# EAGLE board Plinto-Rev_02 (EAGLE 6.5.0)
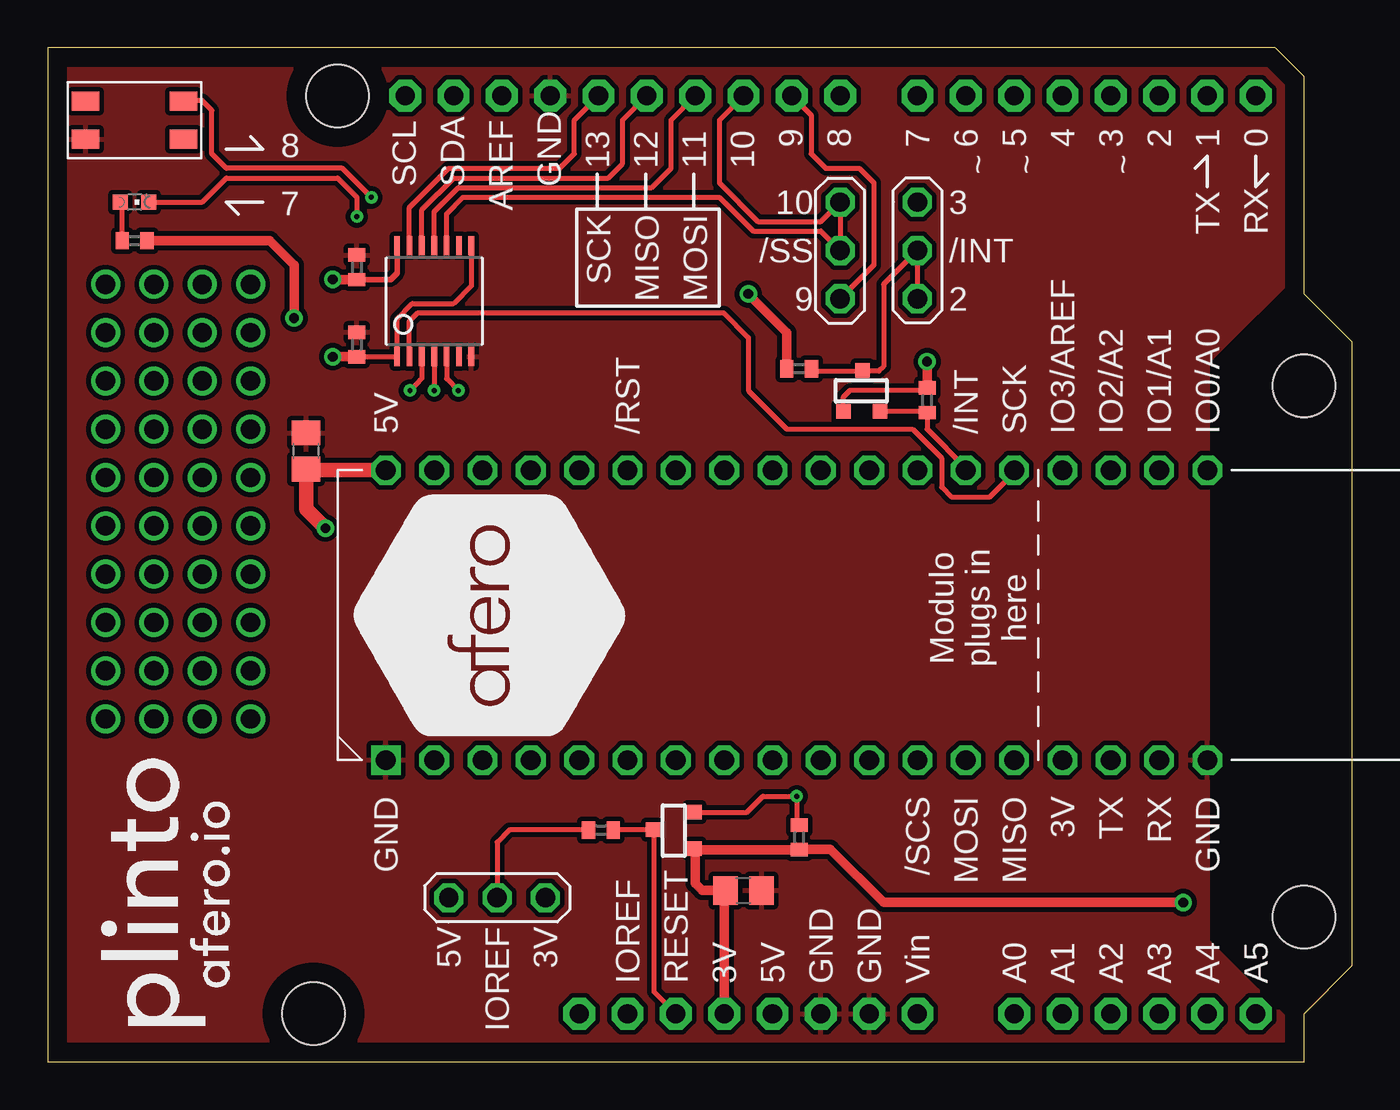
[diagram p0: board, top side]
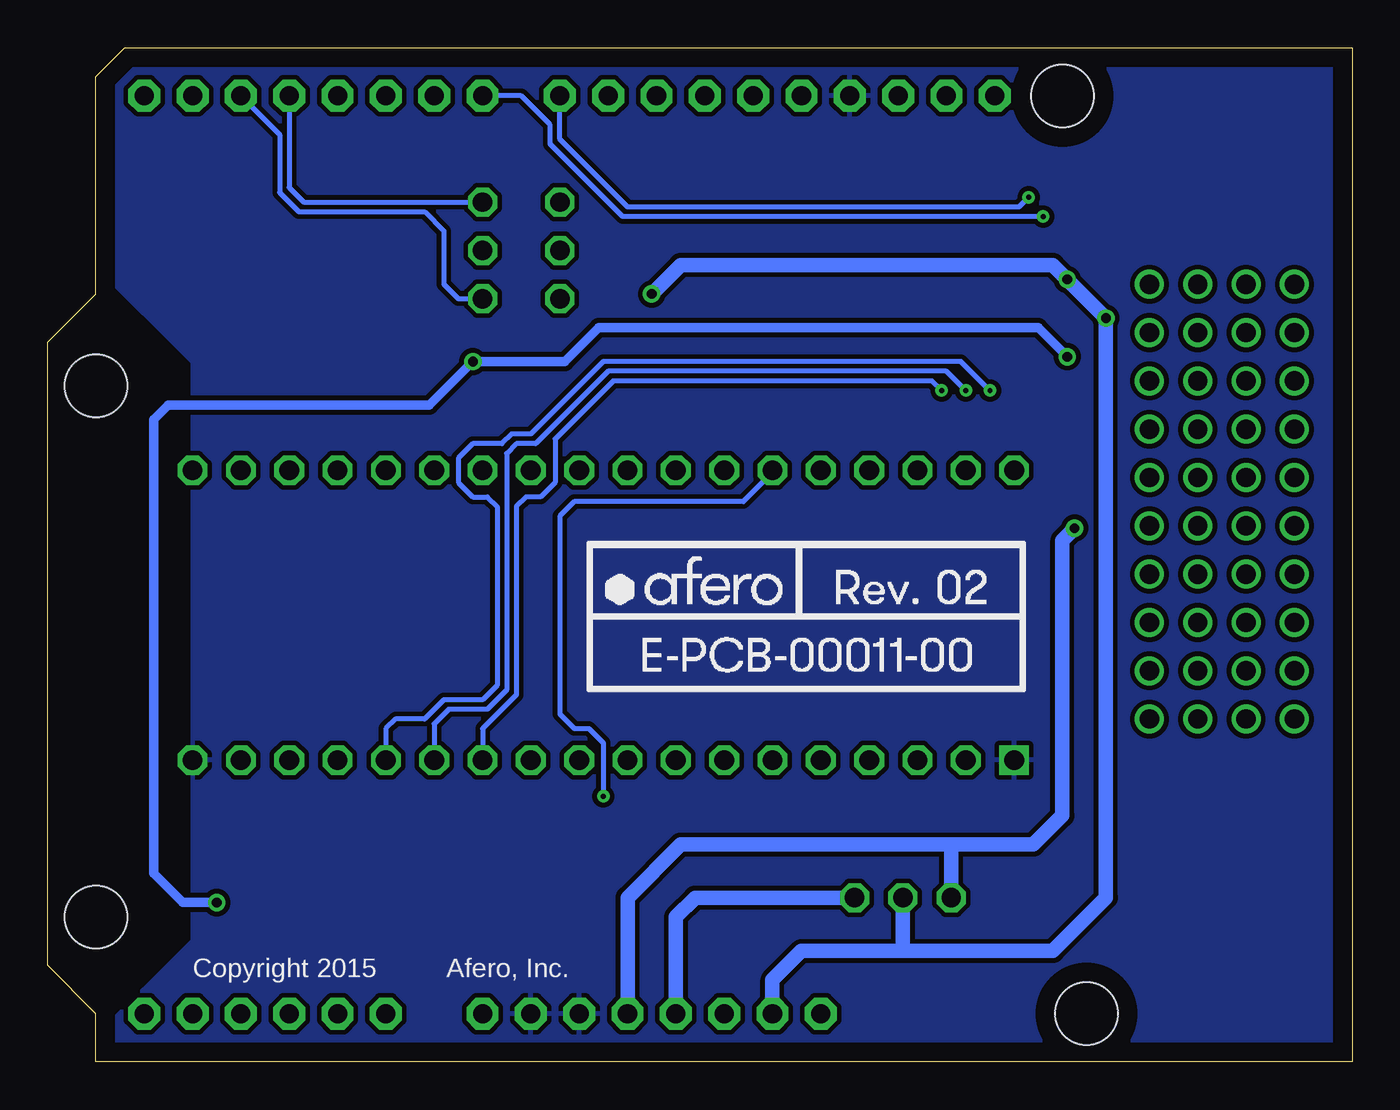
[diagram p1: board, bottom side, seen from below]

Size 68.58 x 53.34 mm. Coordinates in mm from the lower left corner, seen from the top.
Copper layers (1*16): Top 0.035mm / dielectric 1.5mm / Bottom 0.035mm
Design rules "default *": minimum track width 10mil, minimum drill 10mil, track to track 10mil, track to pad 10mil, pad to pad 10mil, via to via 10mil, smd to smd 10mil, copper to edge 40mil, drill to drill 10mil, minimum pad ring 10mil, minimum via ring 8mil, stop-mask expansion 4mil, vias tented up to drill 20mil, thermal gap 10mil

## Footprints (pad centres in the part's own frame; a part is rotated, then mirrored left to right if it is on the bottom)
C0402 = smd 0.7 x 0.9: 1 -0.65,0; 2 0.65,0
C0805 = smd 1.3 x 1.5: 1 -0.95,0; 2 0.95,0
3PIN_JMPR = drill 1.016 octagon: 1 -2.54,0; 2 0,0; 3 2.54,0
CHIPLED_0603 = smd 0.8 x 0.8: A 0,-0.75; C 0,0.75
SOT-23 = smd 0.762 x 0.762: 1 -0.979,-1.101; 2 0.94,-1.101; 3 0.025,1.067
R0402 = smd 0.7 x 0.9: 1 -0.65,0; 2 0.65,0
MODULO = drill 1.041 square: 1 27.94,7.62 | drill 1.041 octagon: 2 25.4,7.62; 3 22.86,7.62; 4 20.32,7.62; 5 17.78,7.62; 6 15.24,7.62; 7 12.7,7.62; 8 10.16,7.62; 9 7.62,7.62; 10 5.08,7.62; 11 2.54,7.62; 12 0,7.62; 13 -2.54,7.62; 14 -5.08,7.62; 15 -7.62,7.62; 16 -10.16,7.62; 17 -12.7,7.62; 18 -15.24,7.62; 19 -15.24,-7.62; 20 -12.7,-7.62; 21 -10.16,-7.62; 22 -7.62,-7.62; 23 -5.08,-7.62; 24 -2.54,-7.62; 25 0,-7.62; 26 2.54,-7.62; 27 5.08,-7.62; 28 7.62,-7.62; 29 10.16,-7.62; 30 12.7,-7.62; 31 15.24,-7.62; 32 17.78,-7.62; 33 20.32,-7.62; 34 22.86,-7.62; 35 25.4,-7.62; 36 27.94,-7.62
EVQP2 = smd 1.45 x 1: P$1 2.575,1; P$2 2.575,-1; P$3 -2.575,1; P$4 -2.575,-1
TSSOP14 = smd 0.305 x 0.991: 1 -1.95,-2.918; 2 -1.3,-2.918; 3 -0.65,-2.918; 4 0,-2.918; 5 0.65,-2.918; 6 1.3,-2.918; 7 1.95,-2.918; 8 1.95,2.918; 9 1.3,2.918; 10 0.65,2.918; 11 0,2.918; 12 -0.65,2.918; 13 -1.3,2.918; 14 -1.95,2.918
ARDUINO_R3 = drill 1 pad 1.676 octagon: 3V 35.56,2.54; 5V 38.1,2.54; A0 50.8,2.54; A1 53.34,2.54; A2 55.88,2.54; A3 58.42,2.54; A4 60.96,2.54; A5 63.5,2.54; AREF 23.876,50.8; D0 63.5,50.8; D1 60.96,50.8; D2 58.42,50.8; D3 55.88,50.8; D4 53.34,50.8; D5 50.8,50.8; D6 48.26,50.8; D7 45.72,50.8; D8 41.656,50.8; D9 39.116,50.8; D10 36.576,50.8; D11 34.036,50.8; D12 31.496,50.8; D13 28.956,50.8; GND 26.416,50.8; GND1 43.18,2.54; GND2 40.64,2.54; IOREF 30.48,2.54; RESERVED 27.94,2.54; RESET 33.02,2.54; SCL 18.796,50.8; SDA 21.336,50.8; VIN 45.72,2.54 | hole 3.302: 15.24,50.8; 66.04,35.56; 66.04,7.62; 13.97,2.54

## Placement (x,y rotation side)
C1  100nF  [C0402]  16.26,41.78 90 top
C2  100nF  [C0402]  16.26,37.72 90 top
C3  20uF  [C0805]  13.59,32.13 90 top
C4  20uF  [C0805]  36.58,9.02 0 top
JP1  3PIN_JMPR  [3PIN_JMPR]  23.62,8.64 0 top
JP2  3PIN_JMPR  [3PIN_JMPR]  45.72,42.67 270 top
JP3  3PIN_JMPR  [3PIN_JMPR]  41.66,42.67 90 top
LED1  [CHIPLED_0603]  4.57,45.21 270 top
Q1  2N7002  [SOT-23]  32.89,12.19 90 top
Q2  2N7002  [SOT-23]  42.8,35.31 0 top
R1  300  [R0402]  4.57,43.18 0 top
R2  10K  [R0402]  29.08,12.19 0 top
R3  10K  [R0402]  39.5,36.45 0 top
R4  10K  [R0402]  46.23,34.8 270 top
R5  10K  [R0402]  39.5,11.81 90 top
RM1  MODULOAFERO-DB-01  [MODULO]  45.72,23.5 180 top
S1  EVQP2  [EVQP2]  4.57,49.53 0 top
U1  [TSSOP14]  20.32,40.01 0 top
U$1  ARDUINO_UNO_R3KIBANVERSION  [ARDUINO_R3]  0,0 0 top
U$2  [AFERO_LOGO_SMALL]  30.35,17.14 90 top

## Library data of the parts
C1 C2 = resistor; DESC: 100nF X7R, +/-10%; DKPN: 490-4759-1-ND
C3 C4 = rcl
JP1-JP3 S1 U$1 = Kiban_Libs
LED1 R1-R5 U1 = adafruit
Q1 Q2 = transistors
RM1 = AferoLib
U$2 = Afero_Logos

## Nets
3V0: C2.1 C4.1 JP1.3 Q1.1 Q2.1 R4.1 R5.1 U1.1 U1.8 U$1.3V
3V0_OUT: RM1.15
5V0: C3.1 JP1.1 RM1.36 U$1.5V
/INT: JP2.2 JP2.3 Q2.3 R3.2 U$1.D2
/INT_3: Q2.2 R4.2 RM1.24
/RST: Q1.3 R2.2 U$1.RESET
/RST_3: Q1.2 R5.2 RM1.31
/SS: JP3.2 JP3.3 U1.10 U$1.D10
/SS_3: RM1.12 U1.5
GND: C1.2 C2.2 C3.2 C4.2 RM1.1 RM1.18 S1.P$4 U1.7 U$1.GND U$1.GND1 U$1.GND2
IOREF: C1.1 JP1.2 R1.2 R2.1 R3.1 U1.14 U$1.IOREF
MISO: U1.12 U$1.D12
MISO_3: RM1.14 U1.3
MOSI: U1.11 U$1.D11
MOSI_3: RM1.13 U1.4
N$1: LED1.A R1.1
N$3: LED1.C U$1.D7
N$4: JP2.1 U$1.D3
N$5: S1.P$1 U$1.D8
N$48: JP3.1 U$1.D9
SCK: U1.13 U$1.D13
SCK_3: RM1.23 U1.2
VIN: U$1.VIN

## Tracks (layer width: path | path; a pad name or v marks a point on that pad's centre or on a via)
3V0  (via drill 0.51)
  Top 0.254: 41.73,34.29 Q2.1 | Q2.1 41.82,34.96 42.16,35.31 46.09,35.31 R4.1 | 41.65,34.04 Q2.1 | U1.8 22.27,40.81 21.34,39.88 19.18,39.88 18.37,39.07 U1.1 16.27,37.09 C2.1
  Top 0.508: U$1.3V 35.56,9.08 | v59.69,8.38 43.94,8.38 41.15,11.18 40.02,11.18 R5.1 34.05,11.16 Q1.1 34.04,11.17 34.04,9.4 34.42,9.02 C4.1 35.56,9.08 | v46.23,36.83 R4.1 | C2.1 16.24,37.08 v14.99,37.08 | 35.56,9.27 35.56,9.08
  Bottom 0.508: v59.69,8.38 61.47,8.38 62.99,9.91 62.99,33.78 62.23,34.54 48.51,34.54 v46.23,36.83 41.4,36.83 39.62,38.61 16.51,38.61 v14.99,37.08
  Bottom 0.762: U$1.3V 35.56,7.62 34.54,8.64 JP1.3
5V0  (via drill 0.51)
  Top 0.762: v14.61,28.07 13.59,29.08 C3.1 14.04,31.11 RM1.36
  Bottom 0.762: U$1.5V 38.1,8.64 35.31,11.43 21.08,11.43 | 21.08,11.43 16.76,11.43 15.24,12.95 15.24,27.43 v14.61,28.07 | JP1.1 21.08,11.43
/INT
  Top 0.254: R3.2 40.15,36.56 40.39,36.32 42.77,36.32 Q2.3 42.88,36.32 43.69,36.32 43.94,36.58 43.94,40.89 JP2.2 JP2.3
  Bottom 0.254: U$1.D2 56.39,48.77 56.39,45.72 55.37,44.7 48.77,44.7 47.75,43.69 47.75,40.89 46.99,40.13 JP2.3
/INT_3
  Top 0.254: 43.69,34.15 Q2.2 46.14,34.2 R4.2 46.23,33.27 48.26,31.24 RM1.24
/RST
  Top 0.254: R2.2 29.89,12.22 Q1.3 31.88,12.17 31.88,3.68 U$1.RESET
/RST_3  (via drill 0.25)
  Top 0.254: R5.2 39.37,12.59 v39.37,13.97 37.59,13.97 36.75,13.13 Q1.2
  Bottom 0.254: RM1.31 30.48,30.99 32,29.46 40.89,29.46 41.66,28.7 41.66,18.29 40.89,17.53 40.13,17.53 39.37,16.76 v39.37,13.97
/SS
  Top 0.254: U1.10 20.97,44.59 21.84,45.47 35.31,45.47 37.08,43.69 40.64,43.69 JP3.2 JP3.3 40.64,44.2 37.34,44.2 35.31,46.23 35.31,49.53 U$1.D10
/SS_3  (via drill 0.25)
  Top 0.254: U1.5 20.97,35.93 v21.59,35.31
  Bottom 0.254: v21.59,35.31 22.1,35.81 38.86,35.81 41.91,32.77 41.91,30.48 42.67,29.72 43.43,29.72 43.94,29.21 43.94,19.3 45.72,17.53 RM1.12
GND
  pour Bottom: 0,53.34 66.04,53.34 66.04,41.91 60.96,36.83 60.96,6.35 66.04,1.27 66.04,0 0,0
  pour Top: 0,53.34 66.04,53.34 66.04,41.91 60.96,36.83 60.96,6.35 66.04,1.27 66.04,0 0,0
IOREF  (via drill 0.51)
  Top 0.254: U1.14 | R2.1 24.26,12.19 23.62,11.56 JP1.2
  Top 0.279: U1.14 18.37,41.48 18.03,41.15 16.27,41.15 C1.1
  Top 0.508: v12.95,39.12 12.95,41.91 11.68,43.18 R1.2 | v36.83,40.39 38.86,38.35 38.86,36.46 R3.1 | v14.99,41.15 16.24,41.15 C1.1
  Bottom 0.762: U$1.IOREF 30.48,4.32 28.96,5.84 23.62,5.84 | 23.62,5.84 15.75,5.84 12.95,8.64 v12.95,39.12 v14.99,41.15 15.75,41.91 35.31,41.91 v36.83,40.39 | JP1.2 23.62,5.84
MISO
  Top 0.254: U1.12 19.67,44.82 21.34,46.48 29.46,46.48 30.23,47.24 30.23,49.53 U$1.D12
MISO_3  (via drill 0.25)
  Top 0.254: U1.3 19.67,35.96 v19.05,35.31
  Bottom 0.254: v19.05,35.31 20.57,36.83 39.37,36.83 43.18,33.02 44.2,33.02 44.7,32.51 46.23,32.51 46.99,31.75 46.99,30.48 46.23,29.72 45.47,29.72 44.96,29.21 44.96,19.81 45.72,19.05 47.75,19.05 48.77,18.03 50.29,18.03 50.8,17.53 RM1.14
MOSI
  Top 0.254: U1.11 20.32,44.7 21.59,45.97 31.75,45.97 32.77,46.99 32.77,49.53 U$1.D11
MOSI_3  (via drill 0.25)
  Top 0.254: U1.4 v20.32,35.31
  Bottom 0.254: v20.32,35.31 21.34,36.32 39.12,36.32 42.93,32.51 43.94,32.51 44.45,32 44.45,19.56 45.47,18.54 47.5,18.54 48.26,17.78 RM1.13
N$1
  Top 0.254: LED1.A 3.9,45.12 3.9,43.26 R1.1
N$3  (via drill 0.25)
  Top 0.254: LED1.C 8.13,45.21 9.4,46.48 15.24,46.48 16.26,45.47 v16.26,44.45
  Bottom 0.254: v16.26,44.45 38.35,44.45 42.16,48.26 42.16,49.28 43.69,50.8 U$1.D7
N$4
  Bottom 0.254: U$1.D3 55.88,45.97 55.12,45.21 JP2.1
N$5  (via drill 0.25)
  Top 0.254: v17.02,45.47 15.49,46.99 9.4,46.99 8.64,47.75 8.64,50.04 8.13,50.55 7.16,50.55 S1.P$1
  Bottom 0.254: v17.02,45.47 17.53,44.96 38.1,44.96 41.66,48.51 U$1.D8
N$7  (via drill 1.02)
  other vias: 3.05,38.35
N$8  (via drill 1.02)
  other vias: 5.59,38.35
N$9  (via drill 1.02)
  other vias: 8.13,38.35
N$10  (via drill 1.02)
  other vias: 10.67,38.35
N$11  (via drill 1.02)
  other vias: 3.05,40.89
N$12  (via drill 1.02)
  other vias: 5.59,40.89
N$13  (via drill 1.02)
  other vias: 8.13,40.89
N$14  (via drill 1.02)
  other vias: 10.67,40.89
N$15  (via drill 1.02)
  other vias: 10.67,35.81
N$16  (via drill 1.02)
  other vias: 8.13,35.81
N$17  (via drill 1.02)
  other vias: 5.59,35.81
N$18  (via drill 1.02)
  other vias: 3.05,35.81
N$19  (via drill 1.02)
  other vias: 3.05,33.27
N$20  (via drill 1.02)
  other vias: 5.59,33.27
N$21  (via drill 1.02)
  other vias: 8.13,33.27
N$22  (via drill 1.02)
  other vias: 10.67,33.27
N$23  (via drill 1.02)
  other vias: 10.67,18.03
N$24  (via drill 1.02)
  other vias: 8.13,18.03
N$25  (via drill 1.02)
  other vias: 5.59,18.03
N$26  (via drill 1.02)
  other vias: 3.05,18.03
N$27  (via drill 1.02)
  other vias: 3.05,20.57
N$28  (via drill 1.02)
  other vias: 5.59,20.57
N$29  (via drill 1.02)
  other vias: 8.13,20.57
N$30  (via drill 1.02)
  other vias: 10.67,20.57
N$31  (via drill 1.02)
  other vias: 10.67,23.11
N$32  (via drill 1.02)
  other vias: 8.13,23.11
N$33  (via drill 1.02)
  other vias: 5.59,23.11
N$34  (via drill 1.02)
  other vias: 3.05,23.11
N$35  (via drill 1.02)
  other vias: 3.05,25.65
N$36  (via drill 1.02)
  other vias: 3.05,28.19
N$37  (via drill 1.02)
  other vias: 3.05,30.73
N$38  (via drill 1.02)
  other vias: 5.59,30.73
N$39  (via drill 1.02)
  other vias: 8.13,30.73
N$40  (via drill 1.02)
  other vias: 10.67,30.73
N$41  (via drill 1.02)
  other vias: 10.67,28.19
N$42  (via drill 1.02)
  other vias: 10.67,25.65
N$43  (via drill 1.02)
  other vias: 8.13,25.65
N$44  (via drill 1.02)
  other vias: 5.59,25.65
N$45  (via drill 1.02)
  other vias: 5.59,28.19
N$46  (via drill 1.02)
  other vias: 8.13,28.19
N$48
  Top 0.254: U$1.D9 40.13,49.78 40.13,47.75 40.89,46.99 42.67,46.99 43.43,46.23 43.43,41.91 JP3.1
SCK
  Top 0.254: U1.13 19.02,44.93 21.08,46.99 26.92,46.99 27.69,47.75 27.69,49.53 U$1.D13
SCK_3
  Top 0.254: U1.2 19.02,38.96 19.43,39.37 35.56,39.37 36.83,38.1 36.83,35.31 38.86,33.27 45.47,33.27 46.99,31.75 46.99,30.23 47.5,29.72 49.53,29.72 50.8,30.99 RM1.23

## Text on the board
tPlace: 8 | ~ | ~ | ~ | 10 | 7 | SCK | MISO | MOSI | 3 | /SS | TX | RX | /INT | 9 | 2 | Modulo / plugs in / here | 5V | IOREF | 3V
bPlace: Afero, Inc. | Copyright 2015
Document: Released under the Creative Commons Attribution 4.0 International Public License / https://creativecommons.org/licenses/by/4.0 / / Original design by Afero, Inc.